# Altium PCB CANLink_V2.PcbDoc (part 2 of 3)
Units mm, origin at the board's own origin, x right, y up, seen from the top; angles counter-clockwise.
Board outline 75 x 56 mm, 2 copper layers (Top Layer, Bottom Layer); 205 components, 140 nets, 648 pads, 309 vias.
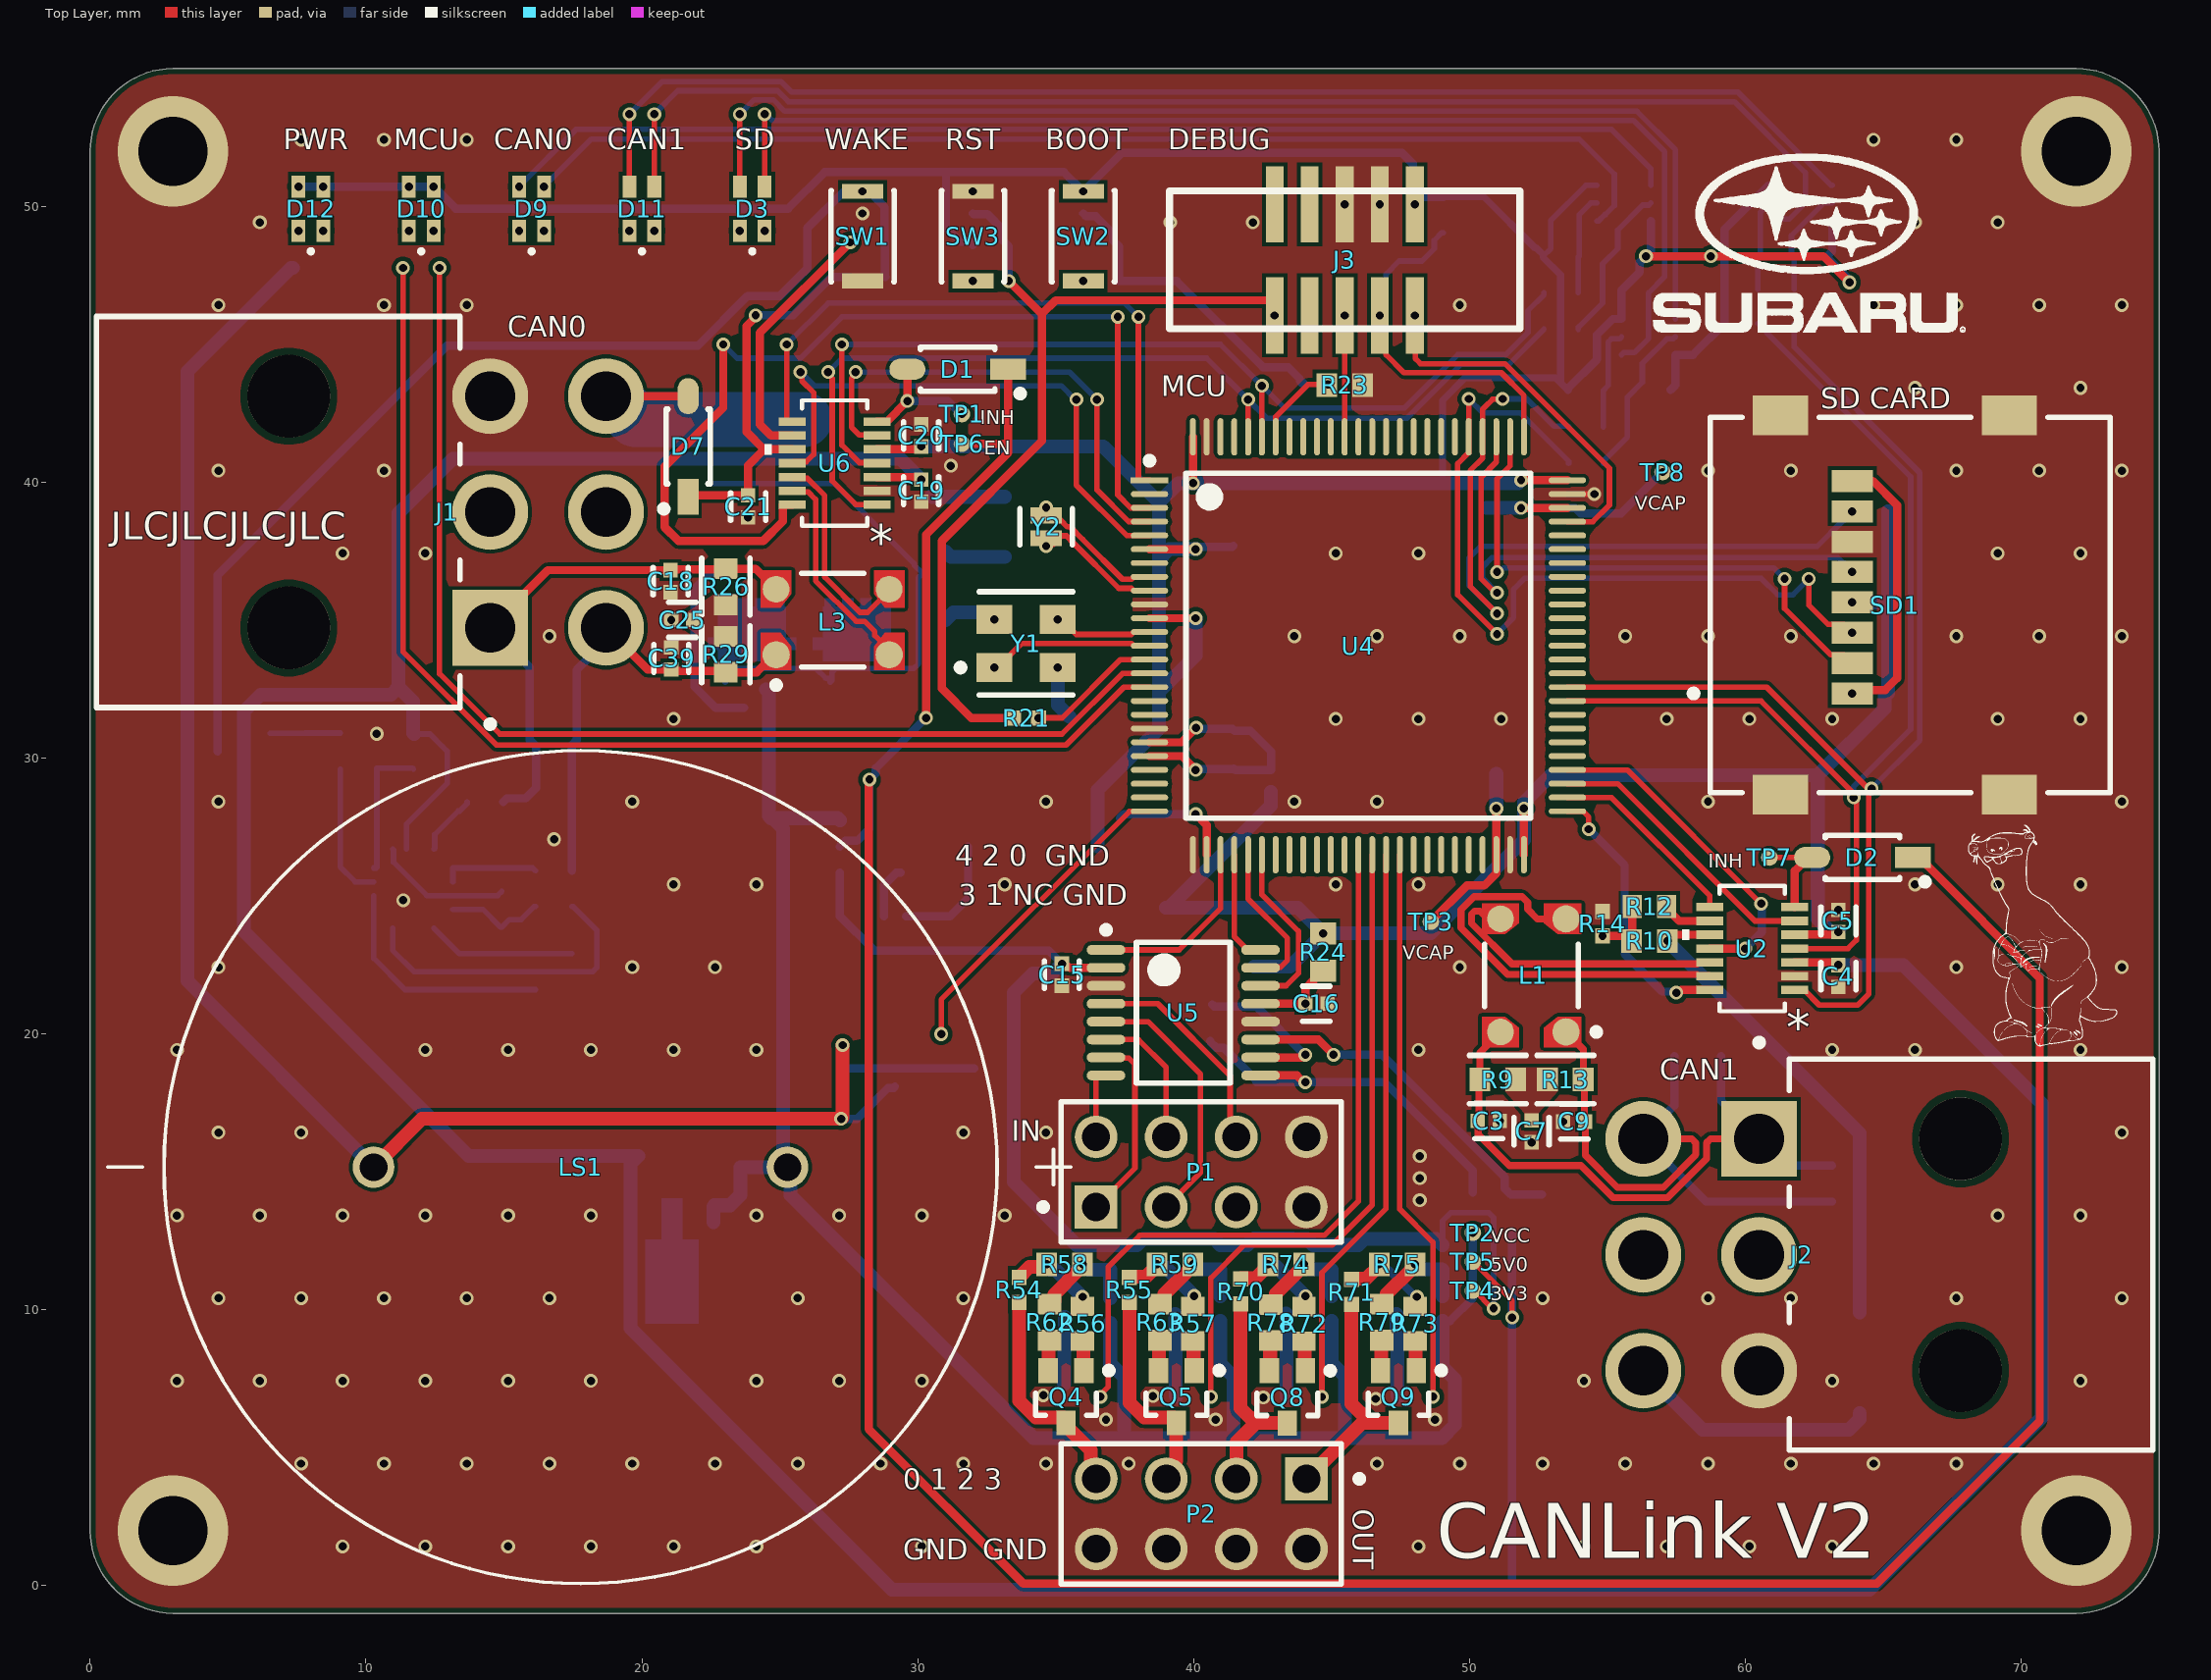
[diagram p0: Top Layer view]

## Part data (continued)
R11 R28: library part CMP-2000-00213-2, "Chip Resistor, 120 Ohm, +/- 1%, 0.1 W, -55 to 155 degC, 0603 (1608 Metric), RoHS, Tape and Reel", Case Code (Imperial)=0603, Case Code (Metric)=1608, Manufacturer=Panasonic, Max Operating Temperature=155degC, Max Power Dissipation=100mW, Min Operating Temperature=-55degC, Package Description="2-Pin Surface Mount Device, Body 1.6 x 0.85 mm", Package Quantity=1, Resistance=120Ohm, Temperature Coefficient=100ppm/degreesC, Tolerance=1%, Voltage Rating=75V, Case/Package=0603, Composition=ThickFilm, Contact Plating=Tin, Datasheet URL=https://industrial.panasonic.com/cdbs/www-data/pdf/RDA0000/AOA0000C283.pdf, Datasheet Version=42095.0, Depth=0.8mm, Height=0.022inch, Lead Free=LeadFree, Length=1.6mm, Manufacturer URL=http://www.panasonic.com/, Military Standard=Not, Mount=SurfaceMount, Number of Pins=2, Number of Terminations=2, Package Reference=0603, Package URL=http://www.st.com/st-web-ui/static/active/en/resource/technical/document/datasheet/CD00001320.pdf, Packaging=TapeandReel, Power Rating=100mW, Radiation Hardening=No, REACH SVHC=NoSVHC, RoHSCompliant=true, Termination=SMD/SMT, Voltage Rating (DC)=75V, Width=0.031inch
R14 R21 R22 R50 R51 R52 R53 R54 R55 R66 R67 R68 R69 R70 R71: library part CMP-009-00206-2, "READ THE NAME"
R16 R17 R19: library part CMP-2000-00182-1, Manufacturer=Panasonic, Part Number=ERJ-3EKF1003V
R44 R45 R46: library part CMP-2000-00435-2, "Chip Resistor, 330 Ohm, +/- 1%, 0.1 W, -55 to 155 degC, 0603 (1608 Metric), RoHS, Tape and Reel", Current Rating="500 mA", Max Operating Temperature="85 degC", Min Operating Temperature="-25 degC", Package Quantity=1500, Voltage Rating="10 V", ComponentLink1Description="Manufacturer URL", ComponentLink1URL=http://www.panasonic.com/, ComponentLink2Description=Datasheet, ComponentLink2URL=http://industrial.panasonic.com/cdbs/www-data/pdf/RDA0000/AOA0000C86.pdf, Contact Finish=Gold, Contact Material=Copper, Contact Plating=Gold, DatasheetVersion=Apr-15, Gender=Male, Height="1.45 mm", Lead Pitch="1.1 mm", Length="13.7 mm", Mating Cycles=10000, Mount="Surface Mount", PackageDescription="2-Pin Surface Mount Device, Body 1.6 x 0.85 mm", PackageReference=0603, Packaging="Tape and Reel", Pins=8, REACH SVHC="No SVHC", RoHSCompliant=true, Width="1.45 mm"
SD1: library part CMP-2000-05245-1, "MicroSD Card Connector, Hinge Type, -40 to 85 degC, 8-Pin SMD, RoHS, Tape and Reel", Current Rating=500mA, Manufacturer=Molex, Voltage Rating=100VDC, Brand=Molex, Card Type=microSD, Contact Material=CopperAlloy, Datasheet URL=http://www.molex.com/pdm_docs/sd/472192001_sd.pdf, Datasheet Version="Rev. F, 06/2009", Factory Pack Quantity=2400, Housing Material=Thermoplastic, Insertion - Extraction Style=Hinged, Manufacturer URL=http://www.molex.com/, Mounting Style=SMD/SMT, Number of Contacts=8, Packaging=Reel, Pitch=1.09mm, Product=CardConnectors, Product Category=MemoryCardConnectors, RoHS=Details, Series=47219, Termination Style=SMD
SW1 SW2 SW3: library part CMP-10040-000029-1, "SWITCH TACTILE SPST-NO 0.02A 15V", Current Rating=5A, Flammability Rating="UL94 V-0", Insulation Color=Black, Max Operating Temperature=85°C, Min Operating Temperature=-40°C, Operating Force=240gf, Actuator Type=Standard, Connector Type=USB, Contact Plating=Gold, Gender=Receptacle, Illumination Type=Non-Illuminated, Mechanical Life=500000Cycles, Mount="Surface Mount", Number of Contacts=24, Number of Ports=1, Packaging="Tape and Reel", Switch Function=Off-Mom, Switch Travel=0.13mm, Termination=Solder, Throw Configuration=SPST
TP1 TP2 TP3 TP4 TP5 TP6 TP7 TP8: library part CMP-00028-00002-2, "0.6mm round", Pins=1
U1: library part CMP-014-00004-1, "LM2902 Series 30 V 1.3 MHz Low-Power Quad Operational Amplifier - QFN-16 (3x3)"
U2 U6: library part CMP-015-00012-2, "Automotive CAN FD transceiver with watchdog, bus diagnostics and partial networking via sele 14-SOT-23-THIN -40 to 150"
U3: library part CMP-12757-000006-1, "IC REG BUCK 3.3V 2A TSOT26", Ambient Temperature Range High=+85°C, Ambient Temperature Range Low=-40°C, Manufacturer="Diodes Inc.", Max Junction Temp=+160°C, Max Supply Voltage=32V, Min Supply Voltage=3.8V, Nominal Supply Current=22uA, Output Current=2A, Output Voltage=3.3V, Package=TSOT26, Switching Frequency=1.1MHz, Temperature="to +160°C", Automotive=No, Category=IC, ComponentLink2Description=Datasheet, ComponentLink2URL=https://www.diodes.com/assets/Datasheets/AP63200-AP63201-AP63203-AP63205.pdf, Device Class L1="Integrated Circuits (ICs)", Device Class L2="Power Management ICs", Device Class L3="Voltage Regulators - Switching", Digikey Description="IC REG BUCK 3.3V 2A TSOT26", Footprint Url=https://www.diodes.com/assets/Package-Files/TSOT26.pdf, Height=1mm, Lead Free=Yes, Manufacturer Part Number=AP63203WU-7, Mouser Description="AP63203 Series 3.3 V 2 A SMT Fixed Low IQ Synchronous Buck - TSOT-26", Number of Outputs=1, Octopart=https://octopart.com/ap63203wu-7-diodes+inc.-98099550, Output Type=Fixed, RoHS=TRUE, Standoff Height=0.01mm, Switching Topology=Buck, Temperature Range High=+160°C
U4: library part CMP-12105-000107-1, "IC MCU 32BIT 128KB FLASH 100LQFP"
U5: library part CMP-0054-00372-2, "8-Channel, 50 kSPS to 200 kSPS, 8-Bit A/D Converter, 16-pin TSSOP, Pb-Free", Manufacturer="National Semiconductor", PackageTopMarking=NSUZXYTT*88S022*CIMT, PowerWise=Y, Code_JEDEC=MO-153-AB, ComponentLink1Description="ADC088S022 Datasheet", ComponentLink1URL=http://www.national.com/ds/AD/ADC088S022.pdf, ComponentLink2Description="ADC088S022 Web Page", ComponentLink2URL=http://www.national.com/pf/AD/ADC088S022.html, ComponentLink3Description="MTC16 Package Page", ComponentLink3URL=http://www.national.com/packaging/folders/mtc16.html, CompType="ADC IC", DatasheetVersion=Feb-2010, PackageDescription="Molded TSSOP, Jedec, 5 x 4.4 x 0.9mm Body, 16 Lead, 0.65mm Pitch", PackageReference=MTC16, PackageVersion="revD, Jun-2003", PinCount=16, RevisionNote="Component URLs added", RoHS=Y
U7: library part CMP-12756-000009-1, "IC REG LINEAR 5V 150MA SOT89", Ambient Temperature Range High=+85°C, Ambient Temperature Range Low=-40°C, Dropout Voltage=1000mV, Manufacturer="Diodes Inc.", Max Junction Temp=+125°C, Max Supply Voltage=40V, Min Supply Voltage=3.3V, Nominal Supply Current=2.5-25uA, Output Current=150mA, Output Voltage=5V, Package=SOT89, Temperature="-40°C to +125°C", Automotive=No, Category=IC, ComponentLink2Description=Datasheet, ComponentLink2URL=https://www.diodes.com/assets/Datasheets/AP7381.pdf, Device Class L1="Integrated Circuits (ICs)", Device Class L2="Power Management ICs", Device Class L3="Voltage Regulators - Linear", Digikey Description="IC REG LINEAR 5V 150MA SOT89", Footprint Url=https://www.diodes.com/assets/Package-Files/SOT89.pdf, Height=1.6mm, Lead Free=Yes, Manufacturer Part Number=AP7381-50Y-13, Number of Outputs=1, Octopart=https://octopart.com/ap7381-50y-13-diodes+inc.-87775116, Output Type=Fixed, RoHS=TRUE, Temperature Range High=+125°C, Temperature Range Low=-40°C
Y1: library part CMP-27762-011708-1, "Crystal 48MHz ±20ppm 18pF SMD-4 3.2mm x 2.5mm", Case/Package=CSMD, ESR (Equivalent Series Resistance)=35R, Frequency=48MHz, Frequency Stability=50ppm, Frequency Tolerance=20ppm, Load Capacitance=18pF, Max Operating Temperature=70°C, Min Operating Temperature=-20°C, Operating Frequency="48 MHz", Package Quantity=1000, Resistor Type=Ceramic, Depth=2.5mm, Height=0.031inch, Lead Free="Lead Free", Length=3.2mm, Mount="Surface Mount", Number of Pins=4, Packaging="Tape and Reel", Radiation Hardening=No, REACH SVHC="No SVHC", RoHS Compliant=Yes, Series=ABM8, Series Resistance=35R, Termination=SMD/SMT, Tolerance=20ppm, Width=0.098inch
Y2: library part CMP-40224-000006-1, "CRYSTAL 32.7680KHZ 12.5PF SMD", Frequency=32.768kHz, Load Capacitance=12.5pF, Manufacturer="ECS International", Package=ECX-1210, Temperature="-40°C to +85°C", Temperature Range High=+85°C, Temperature Range Low=-40°C, Tolerance=20ppm, Automotive=No, Category=Crys, ComponentLink2Description=Datasheet, ComponentLink2URL=https://ecsxtal.com/store/pdf/ECX-1210.pdf, Device Class L1="Passive Components", Device Class L2="Crystals / Oscillators", Device Class L3=Crystals, Digikey Description="CRYSTAL 32.7680KHZ 12.5PF SMD", Esr=90kΩ, Height=0.5mm, Lead Free=Yes, Manufacturer Part Number=ECS-.327-12.5-1210-TR, Octopart=https://octopart.com/ecs-.327-12.5-1210-tr-ecs+international-81221340, RoHS=TRUE, Series=ECX-1210

## Via types
v1: diameter 0.5, hole 0.3, Top Layer to Bottom Layer, tented both sides, 305 vias
v2: diameter 4, hole 2.5, Top Layer to Bottom Layer, 4 vias